# Altium PCB 板.PcbDoc (part 4 of 4)
Units mm, origin at the board's own origin, x right, y up, seen from the top; angles counter-clockwise.
Board outline 152.4 x 101.6 mm, 4 copper layers (Top Layer, VCC, GND, Bottom Layer); 183 components, 548 nets, 1331 pads, 689 vias.
Unrouted connection lines stored in the file: 6.
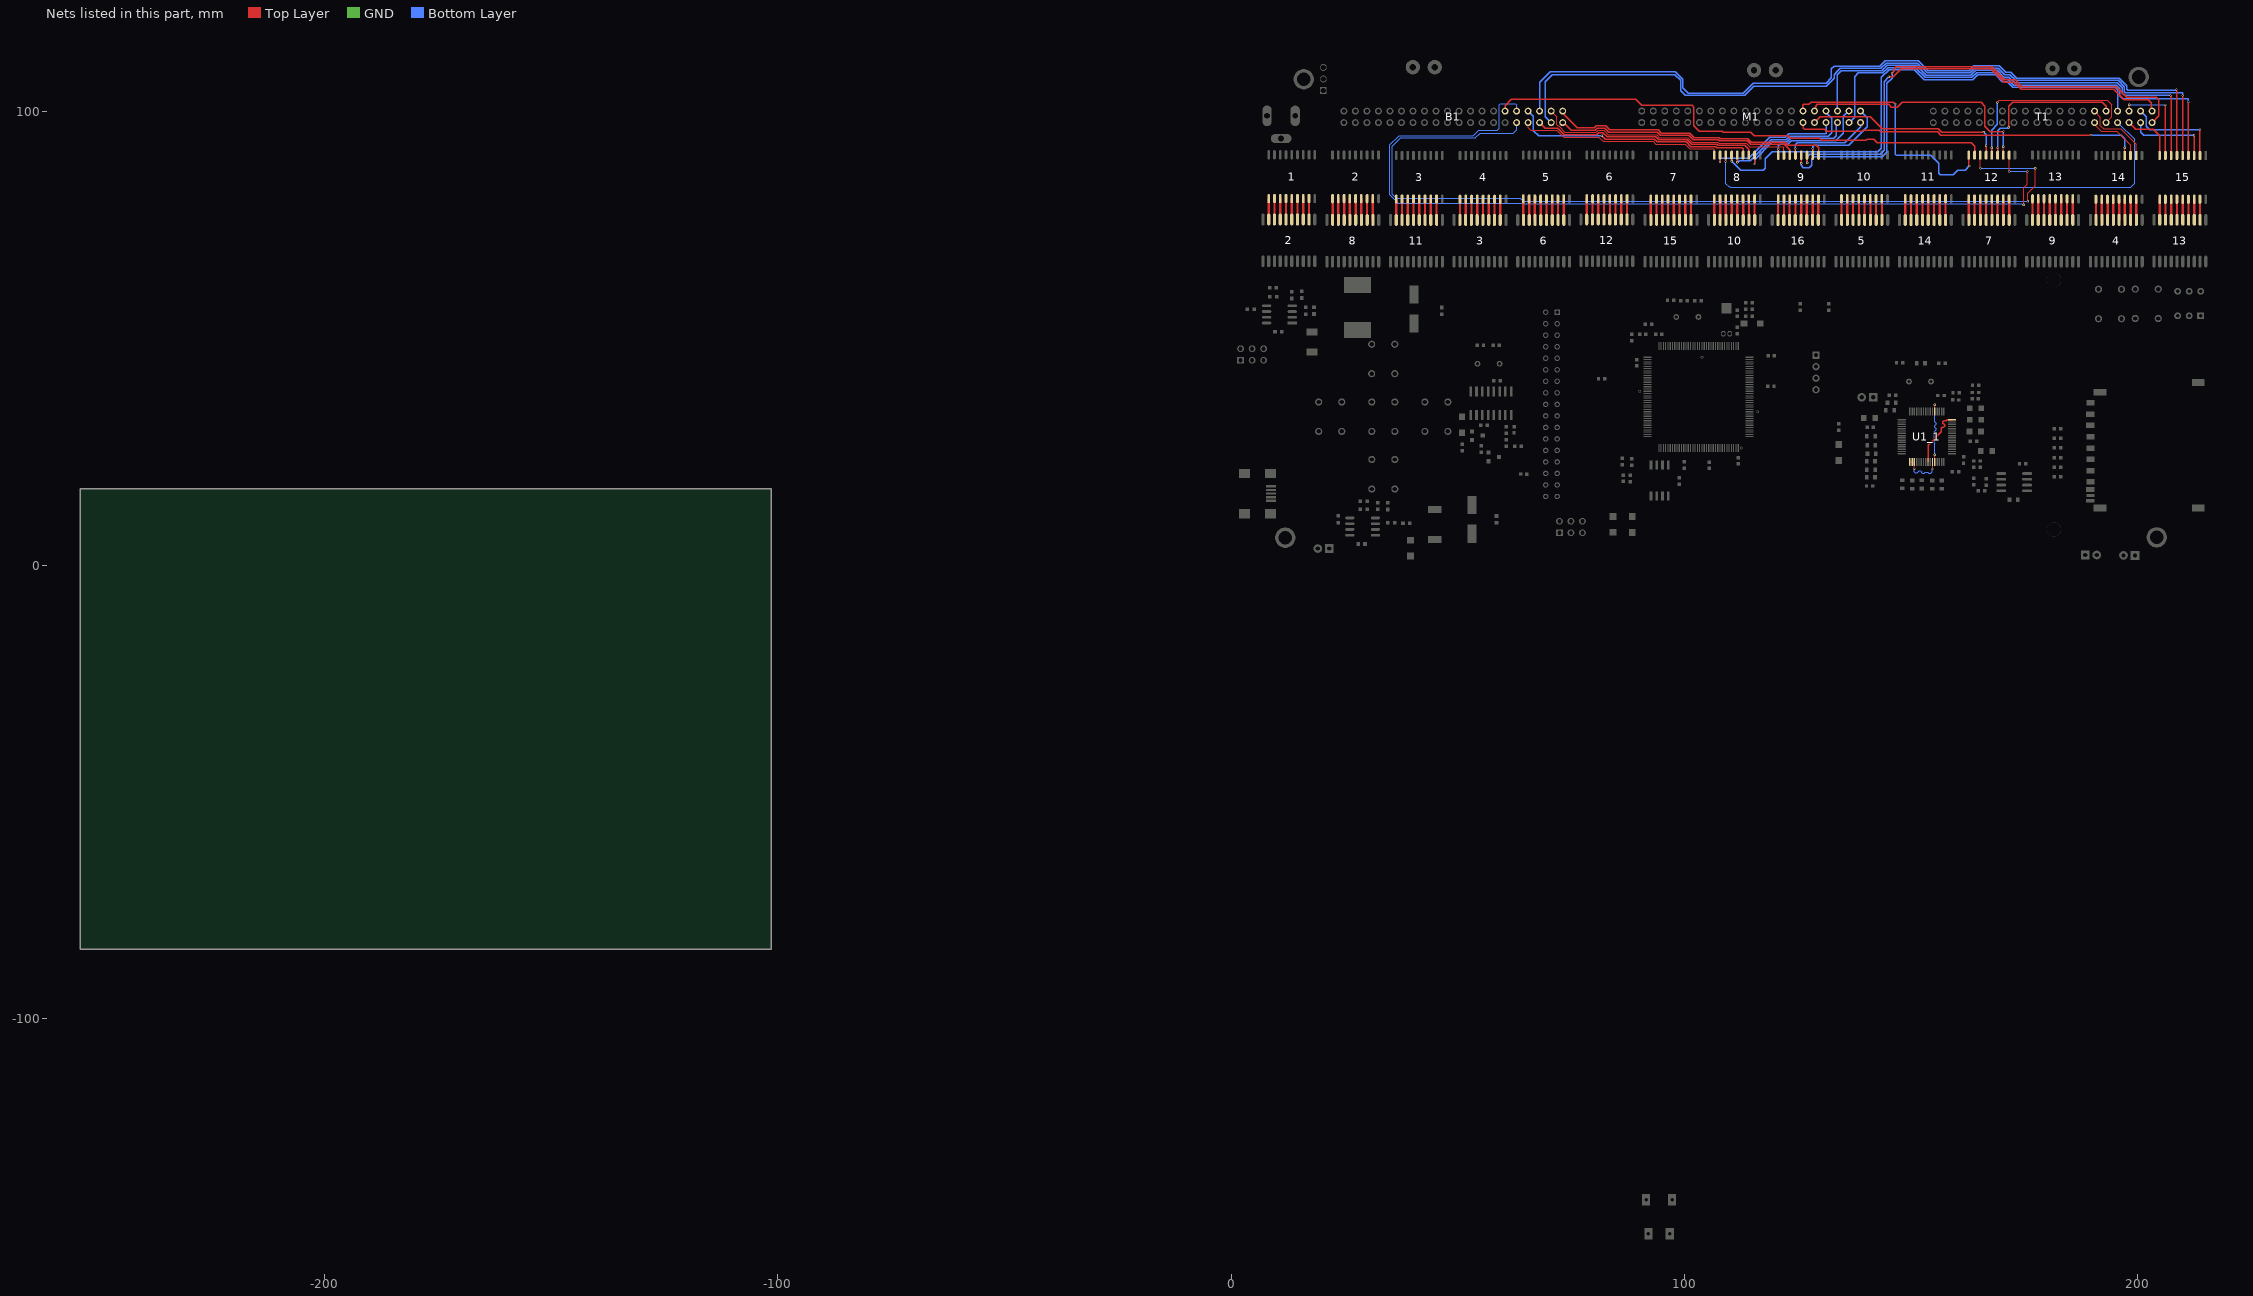
[diagram p6: the nets of this part, all layers, seen from the top]

## Via types
v1: diameter 0.5, hole 0.3, Top Layer to Bottom Layer, 646 vias
v2: diameter 1, hole 0.711, Top Layer to Bottom Layer, 35 vias
v3: diameter 0.5, hole 0.4, Top Layer to Bottom Layer, 2 vias
v4: diameter 1.27, hole 1.016, Top Layer to Bottom Layer, 2 vias
v5: diameter 1, hole 1, Top Layer to Bottom Layer, 2 vias
v6: diameter 3, hole 3, Top Layer to Bottom Layer, tented both sides, 2 vias

## Nets (pads, with @x,y where several pads share a name; then routed paths per layer and width w, separated by ;. In a path a pad name is that pad's centre, name@x,y a point inside that pad or via, vN(x,y) a via of type N, cw(c..) or ccw(c..) an arc to the next point about the centre after c; other vN are vias at no path point) (continued)
W86: 14.13@197.079,90.322 M1.15 | length 77
  Top Layer w0.254: 14.13@197.079,90.322 197.079,91.973 v1(197.104,91.999)
  Top Layer w0.3: M1.15@126.111,97.587 126.223,97.475 126.223,96.375 126.535,96.063 130.89,96.063 131.293,95.66 139.128,95.66 139.387,95.92 142.946,95.92 143.293,95.572 155.787,95.572 156.544,94.815 156.547,94.818 v1(189.636,94.818)
  Bottom Layer w0.3: v1(189.636,94.818) 196.291,94.818 197.104,94.005 v1(197.104,91.999)
W87: 14.12@198.349,90.322 T1.15 | length 12.5
  Top Layer w0.254: T1.15@190.416,97.561 190.416,97.087 191.889,95.613 195.318,95.613 198.349,92.583 14.12@198.349,90.322
W88: 14.11@199.619,90.322 T1.35 | length 15.8
  Top Layer w0.254: T1.35@190.416,100.101 191.719,98.798 191.719,96.901 192.43,96.19 196.24,96.19 199.619,92.812 14.11@199.619,90.322
W89: 12.18@162.687,90.399 M1.35 | length 55.9
  Top Layer w0.3: M1.35@126.111,100.127 126.111,101.399 126.287,101.575 127.388,101.575 127.921,102.108 146.075,102.108 v1(146.507,101.676) ; 12.18@162.687,90.399 162.725,90.361 162.725,88.045 v1(162.763,88.007)
  Bottom Layer w0.3: v1(146.507,101.676) 146.507,90.524 146.683,90.348 154.28,90.348 156.058,88.57 156.058,86.36 156.337,86.081 159.233,86.081 160.249,87.097 161.853,87.097 v1(162.763,88.007)
W90: 12.17@163.957,90.399 B1.35 | length 114.2
  Top Layer w0.3: B1.35@60.419,100.101 60.419,101.313 61.779,102.673 89.224,102.673 90.551,101.346 101.651,101.346 102.057,100.94 102.057,96.926 103.278,95.706 108.271,95.706 108.487,95.49 114.614,95.49 115.396,94.709 122.775,94.709 123.41,94.074 129.773,94.074 130.192,93.654 140.009,93.654 140.31,93.955 141.707,93.955 142.494,93.167 163.195,93.167 163.957,92.405 12.17@163.957,90.399
W91: 12.16@165.227,90.399 B1.16 | length 205.1
  Top Layer w0.254: 12.16@165.227,90.399 165.227,87.528 v1(165.278,87.478) ; v1(175.717,80.213) 175.717,81.984 177.343,83.61 v1(177.343,87.478)
  GND w0.254: B1.16@62.959,97.561 B1.16@63.144,97.376
  Bottom Layer w0.254: B1.16@62.959,97.561 62.959,95.953 62.23,95.225 54.889,95.225 53.848,94.183 37.44,94.183 35.56,92.304 35.56,81.77 36.424,80.906 63.747,80.906 64.44,80.213 157.023,80.213 v1(175.717,80.213) ; v1(165.278,87.478) v1(177.343,87.478)
W92: 12.15@166.497,90.399 M1.16 | length 44.5
  Top Layer w0.3: M1.16@128.651,97.587 129.921,98.857 140.97,98.857 143.561,96.266 155.956,96.266 156.743,95.479 v1(165.964,95.479) ; 12.15@166.497,90.399 v1(166.497,92.456)
  Bottom Layer w0.3: v1(165.964,95.479) 166.497,94.945 v1(166.497,92.456)
W93: 12.14@167.767,90.399 T1.16 | length 43.2
  Top Layer w0.254: v1(167.742,92.05) v1@167.754,92.037 ; 12.14@167.754,90.411 12.14@167.767,90.399 12.14@167.767,89.764 ; v1(168.961,102.032) 169.424,102.495 193.263,102.495 194.259,101.498 194.259,98.864 T1.16@192.956,97.561
  Top Layer w0.3: 12.14@167.754,90.411 v1@167.754,92.037
  Bottom Layer w0.3: v1(167.742,92.05) 167.742,95.936 168.961,97.155 v1(168.961,102.032)
W94: 12.13@169.037,90.399 T1.36 | length 37
  Top Layer w0.254: 12.13@169.037,89.738 12.13@169.037,90.399
  Top Layer w0.3: 12.13@169.037,90.399 v1(169.037,91.999) ; v1(171.475,96.545) 171.475,101.117 171.45,101.143 172.325,102.018 192.089,102.018 192.956,101.151 T1.36@192.956,100.101
  Bottom Layer w0.254: T1.36@192.956,100.101 T1.36@193.314,100.101
  Bottom Layer w0.3: v1(169.037,91.999) 169.037,95.783 169.635,96.382 171.312,96.382 v1(171.475,96.545)
W95: 12.12@170.307,90.399 M1.36 | length 54
  Top Layer w0.254: 12.12@170.307,90.399 v1(170.307,92.227)
  Top Layer w0.3: M1.36@128.651,100.127 128.885,100.361 128.885,101.23 129.255,101.6 145.009,101.6 145.618,100.99 146.939,100.99 147.966,102.018 165.394,102.018 166.243,101.168 166.243,96.774 167.411,95.606 v1(170.358,95.606)
  Bottom Layer w0.3: v1(170.307,92.227) 170.332,92.253 170.332,95.58 v1(170.358,95.606)
W96: 12.11@171.577,90.399 B1.36 | length 203.2
  Top Layer w0.254: v1(171.577,86.792) 12.11@171.577,90.399 ; v1(174.803,79.451) 174.803,80.228 174.803,83.189 175.565,83.951 v1(175.565,86.792)
  Bottom Layer w0.254: B1.36@62.959,100.101 62.959,101.473 62.654,101.778 59.436,101.778 59.157,101.498 59.157,96.368 58.699,95.91 54.585,95.91 53.365,94.691 37.033,94.691 35.027,92.685 35.027,81.661 36.855,79.832 64.062,79.832 64.217,79.676 156.8,79.676 174.374,79.676 174.6,79.451 v1(174.803,79.451) ; v1(171.577,86.792) v1(175.565,86.792)
W97: 8.18@106.553,90.399 B1.17 | length 45.4
  Top Layer w0.254: B1.17@65.499,97.561 65.549,97.511 65.549,96.418 66.065,95.902 71.797,95.902 73.317,94.382 81.118,94.382 82.075,93.425 93.074,93.425 93.675,92.823 100.129,92.823 101.132,91.821 106.35,91.821 106.553,91.618 8.18@106.553,90.399
W98: 8.17@107.823,90.399 M1.17 | length 30
  Top Layer w0.3: v1(107.823,88.875) 8.17@107.823,90.399
  Bottom Layer w0.3: v1(107.823,88.875) 107.823,89.533 107.999,89.709 114.144,89.709 118.753,94.318 122.178,94.318 122.957,95.098 131.191,95.098 M1.17@131.191,97.231
W99: 8.16@109.093,90.399 T1.17 | length 112.5
  Top Layer w0.254: v1(109.093,89.002) 8.16@109.093,90.399
  Bottom Layer w0.254: v1(109.093,89.002) 109.093,84.096 109.816,83.373 110.092,83.373 110.158,83.306 198.394,83.306 199.238,84.15 199.238,93.853 195.686,97.404 195.496,97.214 T1.17@195.496,97.561
W100: 8.15@110.363,90.399 T1.37 | length 114.5
  Top Layer w0.3: 8.15@110.363,90.399 110.376,90.386 110.376,89.065 v1(110.388,89.052)
  Bottom Layer w0.3: v1(110.388,89.052) 112.344,87.097 117.373,87.097 117.831,87.554 117.831,89.56 119.364,91.094 142.58,91.094 143.408,91.923 143.408,107.534 145.085,109.211 150.682,109.211 152.857,107.036 163.576,107.036 164.617,108.077 168.58,108.077 170.028,106.629 171.12,106.629 172.39,105.359 194.996,105.359 195.496,104.859 T1.37@195.496,100.101 T1.37@195.496,99.785
W101: 8.14@111.633,90.399 M1.37 | length 30.5
  Top Layer w0.254: M1.37@131.191,99.728 131.191,99.974 M1.37@131.191,100.127
  Top Layer w0.3: v1(111.633,88.849) 8.14@111.633,90.399 ; M1.37@131.107,100.058 M1.37@131.191,99.974
  Bottom Layer w0.3: v1(111.633,88.849) 111.687,88.849 112.047,89.209 114.485,89.209 119.094,93.818 122.385,93.818 123.164,94.598 131.398,94.598 131.416,94.615 131.699,94.615 132.41,95.326 132.41,98.501 131.191,99.72 M1.37@131.191,99.771
W102: 8.13@112.903,90.399 B1.37 | length 54.1
  Top Layer w0.3: v1(81.763,94.691) 82.552,93.902 93.321,93.902 93.923,93.3 100.327,93.3 101.329,92.298 106.838,92.298 107.061,92.075 112.598,92.075 112.903,91.77 8.13@112.903,90.399
  Bottom Layer w0.3: B1.37@65.499,100.101 66.675,98.925 66.675,95.809 67.793,94.691 v1(81.763,94.691)
W103: 8.12@114.173,90.399 B1.18 | length 50.3
  Top Layer w0.3: B1.18@68.039,97.561 69.221,96.379 71.994,96.379 73.514,94.859 80.584,94.859 81.102,95.377 81.991,95.377 82.966,94.402 93.646,94.402 94.248,93.8 100.534,93.8 101.536,92.798 107.067,92.798 107.29,92.575 113.299,92.575 114.173,91.702 8.12@114.173,90.399
W104: 8.11@115.443,90.399 M1.18 | length 25.8
  Top Layer w0.3: v1(115.443,88.443) 8.11@115.443,90.399
  Bottom Layer w0.3: v1(115.443,88.443) 115.443,89.383 119.379,93.318 122.592,93.318 123.372,94.098 131.605,94.098 131.615,94.107 132.932,94.107 133.497,94.671 133.497,96.997 M1.18@133.731,97.231
W105: 15.18@204.775,90.322 T1.18 | length 12.8
  Top Layer w0.254: T1.18@198.036,97.061 T1.18@198.036,97.561
  Top Layer w0.3: T1.18@198.036,97.561 199.484,96.114 203.378,96.114 204.775,94.717 15.18@204.775,90.322
W106: 15.17@206.045,90.322 T1.38 | length 20.9
  Top Layer w0.254: T1.38@198.036,99.739 T1.38@198.036,100.101 198.04,100.105 198.04,101.494 v1(198.044,101.498)
  Top Layer w0.3: 15.17@206.045,90.322 v1(206.045,101.473)
  Bottom Layer w0.254: v1(198.044,101.498) 198.057,101.486 206.032,101.486 v1(206.045,101.473)
W107: 15.16@207.315,90.322 M1.38 | length 99.3
  Top Layer w0.3: v1(207.162,103.556) 207.315,103.403 15.16@207.315,90.322
  Bottom Layer w0.3: M1.38@133.647,100.787 133.647,108.12 134.561,109.034 143.494,109.034 144.671,110.211 151.096,110.211 153.271,108.036 163.162,108.036 164.203,109.077 168.994,109.077 170.442,107.629 171.534,107.629 172.804,106.359 195.41,106.359 196.496,105.273 196.496,104.088 197.028,103.556 v1(207.162,103.556)
W108: 15.15@208.585,90.322 B1.38 | length 174.2
  Top Layer w0.254: 15.15@208.585,89.789 15.15@208.585,90.322
  Top Layer w0.3: v1(208.509,104.859) 208.509,90.449 208.483,90.424 15.15@208.585,90.322
  Bottom Layer w0.3: B1.38@68.039,100.101 68.039,106.418 70.383,108.763 97.989,108.763 99.611,107.141 99.611,105.215 100.762,104.064 112.954,104.064 115.138,106.248 131.22,106.248 132.385,107.413 132.385,109.449 132.97,110.034 143.08,110.034 144.256,111.211 151.511,111.211 153.686,109.036 162.748,109.036 163.789,110.077 169.408,110.077 170.856,108.629 171.948,108.629 173.218,107.359 195.824,107.359 197.496,105.687 197.496,104.942 197.782,104.656 208.305,104.656 v1(208.509,104.859)
W109: 15.14@209.855,90.322 B1.19 | length 176.2
  Top Layer w0.254: 15.14@209.855,89.687 15.14@209.855,90.322
  Top Layer w0.36: v1(209.829,103.556) 209.842,103.543 209.842,90.335 15.14@209.855,90.322
  Bottom Layer w0.3: B1.19@70.579,97.561 69.317,98.823 69.317,106.629 70.866,108.179 97.866,108.179 99.111,106.934 99.111,104.623 100.178,103.556 113.233,103.556 115.24,105.562 131.242,105.562 132.994,107.315 132.994,108.179 133.68,108.864 133.684,108.864 134.354,109.534 143.287,109.534 144.463,110.711 151.304,110.711 153.479,108.536 162.955,108.536 163.996,109.577 169.201,109.577 170.649,108.129 171.741,108.129 173.011,106.859 195.617,106.859 196.996,105.48 196.996,104.375 197.215,104.156 209.829,104.156 v1(209.829,103.556)
W110: 15.13@211.125,90.322 M1.19 | length 101.8
  Top Layer w0.3: 15.13@211.125,90.322 211.138,90.335 211.138,102.121 v1(211.15,102.133)
  Bottom Layer w0.3: M1.19@136.597,97.862 137.49,98.755 137.49,107.671 138.354,108.534 143.701,108.534 144.878,109.711 150.889,109.711 153.064,107.536 163.369,107.536 164.41,108.577 168.787,108.577 170.235,107.129 171.327,107.129 172.597,105.859 195.203,105.859 195.996,105.066 195.996,103.47 196.647,102.819 211.023,102.819 211.112,102.73 211.112,102.172 v1(211.15,102.133)
W111: 15.12@212.395,90.322 T1.19 | length 18.7
  Top Layer w0.3: v1(212.369,94.767) 212.382,94.755 212.382,90.335 15.12@212.395,90.322
  Bottom Layer w0.3: T1.19@200.576,97.561 200.576,95.436 201.244,94.767 v1(212.369,94.767)
W112: 15.11@213.665,90.322 T1.39 | length 21.7
  Top Layer w0.3: T1.39@200.558,100.119 T1.39@200.576,100.101 ; 15.11@213.665,90.322 v1(213.665,96.037)
  Bottom Layer w0.3: T1.39@200.576,100.101 201.803,98.874 201.803,96.799 202.565,96.037 v1(213.665,96.037)
W113: 9.18@120.65,90.373 M1.39 | length 22.9
  Top Layer w0.3: 9.18@120.65,90.373 120.709,90.432 v1(120.709,91.694)
  Bottom Layer w0.3: v1(120.709,91.694) 120.709,92.414 121.114,92.818 122.799,92.818 123.579,93.598 133.349,93.598 135.026,95.275 135.026,99.009 135.788,99.771 M1.39@136.271,99.771
W114: 9.17@121.92,90.373 B1.39 | length 57.8
  Top Layer w0.254: B1.39@70.579,100.101 71.857,98.823 71.857,97.053 72.054,96.856 72.192,96.856 73.623,95.425 80.476,95.425 80.905,95.854 82.2,95.854 83.175,94.879 93.844,94.879 94.445,94.277 100.731,94.277 101.734,93.275 107.264,93.275 107.487,93.052 113.577,93.052 114.351,92.278 121.768,92.278 121.92,92.126 9.17@121.92,90.373
W115: 9.16@123.19,90.373 B1.20 | length 54.1
  Top Layer w0.3: B1.20@73.119,97.561 73.354,97.561 75.013,95.902 80.278,95.902 80.707,96.331 82.398,96.331 83.257,95.472 93.936,95.472 94.653,94.754 100.929,94.754 101.931,93.752 107.462,93.752 107.685,93.529 113.775,93.529 114.548,92.755 121.965,92.755 123.19,91.53 9.16@123.19,90.373
W116: 9.15@124.46,90.373 M1.20 | length 19.1
  Top Layer w0.3: 9.15@124.46,90.373 v1(124.46,91.872) ; M1.20@138.64,97.83 M1.20@138.727,97.917
  Bottom Layer w0.3: v1(124.46,91.872) 124.46,92.742 124.816,93.098 135.287,93.098 138.811,96.622 M1.20@138.811,97.231
W117: 9.14@125.73,90.373 T1.20 | length 109.8
  Top Layer w0.3: v1(125.705,88.595) 125.717,88.608 125.717,90.36 9.14@125.73,90.373 ; v1(145.745,108.483) 145.745,108.491 146.237,108.982 146.237,109.457 146.69,109.91 167.747,109.91 170.66,106.997 172.877,106.997 174.406,105.469 195.217,105.469 197.536,103.149 204.064,103.149 204.622,102.591 204.622,99.068 T1.20@203.116,97.561
  Bottom Layer w0.3: v1(125.705,88.595) 125.743,88.557 125.743,88.125 126.213,87.655 127.533,87.655 128.041,88.163 128.041,89.535 128.6,90.094 143.586,90.094 144.551,91.059 144.551,106.197 145.745,107.391 v1(145.745,108.483)
W118: 9.13@127,90.373 T1.40 | length 100.9
  Top Layer w0.3: 9.13@127,90.373 127.013,90.361 127.013,88.709 v1(127.025,88.697) ; v1(145.059,107.671) 145.999,107.671 147.739,109.41 167.54,109.41 170.453,106.497 172.67,106.497 174.199,104.969 194.65,104.969 197.002,102.616 202.286,102.616 202.946,101.956 202.946,100.271 T1.40@203.116,100.101
  Bottom Layer w0.3: v1(127.025,88.697) 127.025,90.068 127.551,90.594 143.121,90.594 143.993,91.465 143.993,106.604 v1(145.059,107.671)
W119: 9.12@128.27,90.373 M1.40 | length 20.5
  Top Layer w0.2: 9.12@128.27,90.373 9.12@128.27,90.67 ; M1.40@138.811,99.711 M1.40@138.811,100.127
  Top Layer w0.3: 9.12@128.27,90.67 v1(128.27,91.872) ; M1.40@138.727,100.457 138.763,100.421 M1.40@139.177,100.421
  Bottom Layer w0.3: v1(128.27,91.872) 128.308,91.91 128.308,92.293 128.613,92.598 136.209,92.598 140.233,96.622 140.233,98.68 139.142,99.771 M1.40@138.811,99.771
W120: 9.11@129.54,90.373 B1.40 | length 62.3
  Top Layer w0.254: 9.11@129.54,90.373 9.11@129.553,90.361 ; 129.553,88.862 129.565,88.849
  Top Layer w0.3: B1.40@73.119,100.101 73.406,100.101 73.406,99.314 76.318,96.402 80.071,96.402 80.5,96.831 82.605,96.831 83.464,95.972 94.143,95.972 94.861,95.254 101.136,95.254 102.139,94.252 107.669,94.252 107.892,94.029 113.982,94.029 114.755,93.255 122.172,93.255 122.895,92.532 129.001,92.532 129.54,91.993 9.11@129.54,90.373
XIN: 
XOUT: 
XQ1: 1.1 2.19 | length 4.6
  Top Layer w0.5: 2.19@8.28,76.203 1.1@8.28,80.823
XQ2: 1.2 2.18@9.55,76.203 | length 4.6
  Top Layer w0.5: 2.18@9.55,76.203 1.2@9.55,80.823
XQ3: 1.3 2.17@10.82,76.203 | length 4.6
  Top Layer w0.5: 2.17@10.82,76.203 1.3@10.82,80.823
XQ4: 1.4 2.16@12.09,76.203 | length 4.6
  Top Layer w0.5: 2.16@12.09,76.203 1.4@12.09,80.823
XQ5: 1.5 2.15@13.36,76.203 | length 4.6
  Top Layer w0.5: 2.15@13.36,76.203 1.5@13.36,80.823
XQ6: 1.6 2.14@14.63,76.203 | length 4.6
  Top Layer w0.5: 2.14@14.63,76.203 1.6@14.63,80.823
XQ7: 1.7 2.13@15.9,76.203 | length 4.6
  Top Layer w0.5: 2.13@15.9,76.203 1.7@15.9,80.823
XQ8: 1.8 2.12@17.17,76.203 | length 4.6
  Top Layer w0.5: 2.12@17.17,76.203 1.8@17.17,80.823
XQ9: 5.19 10.1@134.595,80.772 | length 4.7
  Top Layer w0.5: 10.1@134.595,80.772 134.595,76.14 5.19@134.634,76.101
XQ10: 5.18@135.904,76.101 10.2@135.865,80.772 | length 4.6
  Top Layer w0.5: 5.18@135.904,76.101 10.2@135.904,80.733
XQ11: 5.17@137.174,76.101 10.3@137.135,80.772 | length 4.6
  Top Layer w0.5: 5.17@137.135,76.14 10.3@137.135,80.772
XQ12: 5.16@138.444,76.101 10.4@138.405,80.772 | length 4.6
  Top Layer w0.5: 5.16@138.444,76.101 10.4@138.444,80.733
XQ13: 5.15@139.714,76.101 10.5@139.675,80.772 | length 4.6
  Top Layer w0.5: 5.15@139.675,76.14 10.5@139.675,80.772
XQ14: 5.14@140.984,76.101 10.6@140.945,80.772 | length 4.6
  Top Layer w0.5: 5.14@140.984,76.101 10.6@140.984,80.733
XQ15: 5.13@142.254,76.101 10.7@142.215,80.772 | length 4.6
  Top Layer w0.5: 5.13@142.215,76.14 10.7@142.215,80.772
XQ16: 5.12@143.524,76.101 10.8@143.485,80.772 | length 4.6
  Top Layer w0.5: 5.12@143.524,76.101 10.8@143.524,80.733
XQ17: 2.1@22.352,80.797 8.19 | length 4.7
  Top Layer w0.5: 2.1@22.352,80.797 22.38,80.769 8.19@22.38,76.101
XQ18: 2.2@23.622,80.797 8.18@23.65,76.101 | length 4.7
  Top Layer w0.5: 2.2@23.622,80.797 23.622,76.129 8.18@23.65,76.101
XQ19: 2.3@24.892,80.797 8.17@24.92,76.101 | length 4.7
  Top Layer w0.5: 8.17@24.92,76.101 2.3@24.92,80.769
XQ20: 2.4@26.162,80.797 8.16@26.19,76.101 | length 4.7
  Top Layer w0.5: 2.4@26.162,80.797 26.162,76.129 8.16@26.19,76.101
XQ21: 2.5@27.432,80.797 8.15@27.46,76.101 | length 4.7
  Top Layer w0.5: 2.5@27.432,80.797 27.46,80.769 8.15@27.46,76.101
XQ22: 2.6@28.702,80.797 8.14@28.73,76.101 | length 4.7
  Top Layer w0.5: 2.6@28.702,80.797 28.702,76.129 8.14@28.73,76.101
XQ23: 2.7@29.972,80.797 8.13@30,76.101 | length 4.7
  Top Layer w0.5: 8.13@29.972,76.129 2.7@29.972,80.797
XQ24: 2.8@31.242,80.797 8.12@31.27,76.101 | length 4.7
  Top Layer w0.5: 8.12@31.242,76.129 2.8@31.242,80.797
XQ25: 3.1@36.398,80.696 11.19 | length 4.6
  Top Layer w0.5: 11.19@36.398,76.115 3.1@36.398,80.696
XQ26: 3.2@37.668,80.696 11.18@37.682,76.101 | length 4.6
  Top Layer w0.5: 11.18@37.682,76.101 3.2@37.682,80.682
XQ27: 3.3@38.938,80.696 11.17@38.952,76.101 | length 4.6
  Top Layer w0.5: 11.17@38.938,76.115 3.3@38.938,80.696
XQ28: 3.4@40.208,80.696 11.16@40.222,76.101 | length 4.6
  Top Layer w0.5: 11.16@40.222,76.101 3.4@40.222,80.682
XQ29: 3.5@41.478,80.696 11.15@41.492,76.101 | length 4.6
  Top Layer w0.5: 3.5@41.478,80.696 41.478,76.115 11.15@41.492,76.101
XQ30: 3.6@42.748,80.696 11.14@42.762,76.101 | length 4.6
  Top Layer w0.5: 11.14@42.762,76.101 3.6@42.762,80.682
XQ31: 3.7@44.018,80.696 11.13@44.032,76.101 | length 4.6
  Top Layer w0.5: 11.13@44.018,76.115 3.7@44.018,80.696
XQ32: 3.8@45.288,80.696 11.12@45.302,76.101 | length 4.6
  Top Layer w0.5: 11.12@45.302,76.101 3.8@45.302,80.682
XQ33: 11.1@148.666,80.772 14.19 | length 4.7
  Top Layer w0.5: 14.19@148.666,76.101 11.1@148.666,80.772
XQ34: 11.2@149.936,80.772 14.18@149.936,76.101 | length 4.7
  Top Layer w0.5: 14.18@149.936,76.101 11.2@149.936,80.772
XQ35: 11.3@151.206,80.772 14.17@151.206,76.101 | length 4.7
  Top Layer w0.5: 14.17@151.206,76.101 11.3@151.206,80.772
XQ36: 11.4@152.476,80.772 14.16@152.476,76.101 | length 4.7
  Top Layer w0.5: 14.16@152.476,76.101 11.4@152.476,80.772
XQ37: 11.5@153.746,80.772 14.15@153.746,76.101 | length 4.7
  Top Layer w0.5: 14.15@153.746,76.101 11.5@153.746,80.772
XQ38: 11.6@155.016,80.772 14.14@155.016,76.101 | length 4.7
  Top Layer w0.5: 14.14@155.016,76.101 11.6@155.016,80.772
XQ39: 11.7@156.286,80.772 14.13@156.286,76.101 | length 4.7
  Top Layer w0.5: 14.13@156.286,76.101 11.7@156.286,80.772
XQ40: 11.8@157.556,80.772 14.12@157.556,76.101 | length 4.7
  Top Layer w0.5: 14.12@157.556,76.101 11.8@157.556,80.772
XQ41: 3.19 4.1@50.47,80.67 | length 4.5
  Top Layer w0.5: 3.19@50.47,76.127 4.1@50.47,80.67
XQ42: 3.18@51.714,76.101 4.2@51.74,80.67 | length 4.5
  Top Layer w0.5: 3.18@51.714,76.101 4.2@51.714,80.644
XQ43: 3.17@52.984,76.101 4.3@53.01,80.67 | length 4.5
  Top Layer w0.5: 3.17@53.01,76.127 4.3@53.01,80.67
XQ44: 3.16@54.254,76.101 4.4@54.28,80.67 | length 4.5
  Top Layer w0.5: 3.16@54.254,76.101 4.4@54.254,80.644
XQ45: 3.15@55.524,76.101 4.5@55.55,80.67 | length 4.5
  Top Layer w0.5: 3.15@55.55,76.127 4.5@55.55,80.67
XQ46: 3.14@56.794,76.101 4.6@56.82,80.67 | length 4.5
  Top Layer w0.5: 3.14@56.794,76.101 4.6@56.794,80.644
XQ47: 3.13@58.064,76.101 4.7@58.09,80.67 | length 4.5
  Top Layer w0.5: 3.13@58.09,76.127 4.7@58.09,80.67
XQ48: 3.12@59.334,76.101 4.8@59.36,80.67 | length 4.5
  Top Layer w0.5: 3.12@59.36,76.127 4.8@59.36,80.67
XQ49: 5.1@64.44,80.747 6.19 | length 4.6
  Top Layer w0.5: 6.19@64.44,76.137 5.1@64.44,80.747
XQ50: 5.2@65.71,80.747 6.18@65.746,76.101 | length 4.6
  Top Layer w0.5: 6.18@65.746,76.101 5.2@65.746,80.711
XQ51: 5.3@66.98,80.747 6.17@67.016,76.101 | length 4.6
  Top Layer w0.5: 6.17@66.98,76.137 5.3@66.98,80.747
XQ52: 5.4@68.25,80.747 6.16@68.286,76.101 | length 4.6
  Top Layer w0.5: 6.16@68.286,76.101 5.4@68.286,80.711
XQ53: 5.5@69.52,80.747 6.15@69.556,76.101 | length 4.7
  Top Layer w0.5: 5.5@69.52,80.747 69.52,76.137 6.15@69.556,76.101
XQ54: 5.6@70.79,80.747 6.14@70.826,76.101 | length 4.6
  Top Layer w0.5: 6.14@70.826,76.101 5.6@70.826,80.711
XQ55: 5.7@72.06,80.747 6.13@72.096,76.101 | length 4.6
  Top Layer w0.5: 6.13@72.06,76.137 5.7@72.06,80.747
XQ56: 5.8@73.33,80.747 6.12@73.366,76.101 | length 4.6
  Top Layer w0.5: 6.12@73.366,76.101 5.8@73.366,80.711
XQ57: 9.19 13.1@176.729,80.768 | length 4.7
  Top Layer w0.5: 9.19@176.729,76.101 13.1@176.729,80.768
XQ58: 9.18@177.999,76.101 13.2@177.999,80.768 | length 4.7
  Top Layer w0.5: 9.18@178.003,76.105 13.2@178.003,80.772
XQ59: 9.17@179.269,76.101 13.3@179.269,80.768 | length 4.7
  Top Layer w0.5: 9.17@179.269,76.101 13.3@179.269,80.768
XQ60: 9.16@180.539,76.101 13.4@180.539,80.768 | length 4.7
  Top Layer w0.5: 9.16@180.543,76.105 13.4@180.543,80.772
XQ61: 9.15@181.809,76.101 13.5@181.809,80.768 | length 4.7
  Top Layer w0.5: 9.15@181.809,76.101 13.5@181.809,80.768
XQ62: 9.14@183.079,76.101 13.6@183.079,80.768 | length 4.7
  Top Layer w0.5: 9.14@183.083,76.105 13.6@183.083,80.772
XQ63: 9.13@184.349,76.101 13.7@184.349,80.768 | length 4.7
  Top Layer w0.5: 9.13@184.349,76.101 13.7@184.349,80.768
XQ64: 9.12@185.619,76.101 13.8@185.619,80.768 | length 4.7
  Top Layer w0.5: 9.12@185.623,76.105 13.8@185.623,80.772
XQ65: 6.1@78.435,80.772 12.19 | length 4.5
  Top Layer w0.5: 12.19@78.435,76.228 6.1@78.435,80.772
XQ66: 6.2@79.705,80.772 12.18@79.68,76.203 | length 4.5
  Top Layer w0.5: 12.18@79.68,76.203 6.2@79.68,80.747
XQ67: 6.3@80.975,80.772 12.17@80.95,76.203 | length 4.5
  Top Layer w0.5: 12.17@80.975,76.228 6.3@80.975,80.772
XQ68: 6.4@82.245,80.772 12.16@82.22,76.203 | length 4.5
  Top Layer w0.5: 12.16@82.22,76.203 6.4@82.22,80.747
XQ69: 6.5@83.515,80.772 12.15@83.49,76.203 | length 4.5
  Top Layer w0.5: 6.5@83.515,80.772 83.566,80.772 12.15@83.566,76.279
XQ70: 6.6@84.785,80.772 12.14@84.76,76.203 | length 4.5
  Top Layer w0.5: 12.14@84.76,76.203 6.6@84.76,80.747
XQ71: 6.7@86.055,80.772 12.13@86.03,76.203 | length 4.5
  Top Layer w0.5: 12.13@86.055,76.228 6.7@86.055,80.772
XQ72: 6.8@87.325,80.772 12.12@87.3,76.203 | length 4.5
  Top Layer w0.5: 12.12@87.3,76.203 6.8@87.3,80.747
XQ73: 7.1@92.532,80.696 15.19 | length 4.6
  Top Layer w0.5: 15.19@92.532,76.108 7.1@92.532,80.696
XQ74: 7.2@93.802,80.696 15.18@93.828,76.104 | length 4.6
  Top Layer w0.5: 15.18@93.809,76.101 7.2@93.809,80.689
XQ75: 7.3@95.072,80.696 15.17@95.098,76.104 | length 4.6
  Top Layer w0.5: 7.3@95.072,80.696 95.072,76.108 15.17@95.079,76.101
XQ76: 7.4@96.342,80.696 15.16@96.368,76.104 | length 4.6
  Top Layer w0.5: 15.16@96.349,76.101 7.4@96.349,80.689
XQ77: 7.5@97.612,80.696 15.15@97.638,76.104 | length 4.6
  Top Layer w0.5: 15.15@97.612,76.108 7.5@97.612,80.696
XQ78: 7.6@98.882,80.696 15.14@98.908,76.104 | length 4.6
  Top Layer w0.5: 15.14@98.889,76.101 7.6@98.889,80.689
XQ79: 7.7@100.152,80.696 15.13@100.178,76.104 | length 4.6
  Top Layer w0.5: 15.13@100.152,76.108 7.7@100.152,80.696
XQ80: 7.8@101.422,80.696 15.12@101.448,76.104 | length 4.6
  Top Layer w0.5: 15.12@101.429,76.101 7.8@101.429,80.689
XQ81: 4.19 14.1@190.729,80.67 | length 4.5
  Top Layer w0.5: 4.19@190.761,76.101 14.1@190.761,80.638
XQ82: 4.18@192.031,76.101 14.2@191.999,80.67 | length 4.5
  Top Layer w0.5: 4.18@191.999,76.133 14.2@191.999,80.67
XQ83: 4.17@193.301,76.101 14.3@193.269,80.67 | length 4.5
  Top Layer w0.5: 4.17@193.301,76.101 14.3@193.301,80.638
XQ84: 4.16@194.571,76.101 14.4@194.539,80.67 | length 4.5
  Top Layer w0.5: 4.16@194.539,76.133 14.4@194.539,80.67
XQ85: 4.15@195.841,76.101 14.5@195.809,80.67 | length 4.5
  Top Layer w0.5: 4.15@195.841,76.101 14.5@195.841,80.638
XQ86: 4.14@197.111,76.101 14.6@197.079,80.67 | length 4.5
  Top Layer w0.5: 4.14@197.079,76.133 14.6@197.079,80.67
XQ87: 4.13@198.381,76.101 14.7@198.349,80.67 | length 4.5
  Top Layer w0.5: 4.13@198.381,76.101 14.7@198.381,80.638
XQ88: 4.12@199.651,76.101 14.8@199.619,80.67 | length 4.5
  Top Layer w0.5: 4.12@199.619,76.133 14.8@199.619,80.67
XQ89: 7.19 12.1@162.687,80.747 | length 4.6
  Top Layer w0.5: 7.19@162.697,76.101 12.1@162.697,80.736
XQ90: 7.18@163.968,76.101 12.2@163.957,80.747 | length 4.6
  Top Layer w0.5: 7.18@163.957,76.112 12.2@163.957,80.747
XQ91: 7.17@165.237,76.101 12.3@165.227,80.747 | length 4.6
  Top Layer w0.5: 7.17@165.237,76.101 12.3@165.237,80.736
XQ92: 7.16@166.507,76.101 12.4@166.497,80.747 | length 4.6
  Top Layer w0.5: 7.16@166.497,76.111 12.4@166.497,80.747
XQ93: 7.15@167.777,76.101 12.5@167.767,80.747 | length 4.6
  Top Layer w0.5: 7.15@167.777,76.101 12.5@167.777,80.736
XQ94: 7.14@169.047,76.101 12.6@169.037,80.747 | length 4.6
  Top Layer w0.5: 7.14@169.037,76.111 12.6@169.037,80.747
XQ95: 7.13@170.317,76.101 12.7@170.307,80.747 | length 4.6
  Top Layer w0.5: 7.13@170.307,76.111 12.7@170.307,80.747
XQ96: 7.12@171.587,76.101 12.8@171.577,80.747 | length 4.6
  Top Layer w0.5: 7.12@171.587,76.101 12.8@171.587,80.736
XQ97: 8.1@106.553,80.747 10.19 | length 4.6
  Top Layer w0.5: 10.19@106.553,76.118 8.1@106.553,80.747
XQ98: 8.2@107.823,80.747 10.18@107.841,76.101 | length 4.6
  Top Layer w0.5: 10.18@107.841,76.101 8.2@107.841,80.729
XQ99: 8.3@109.093,80.747 10.17@109.111,76.101 | length 4.6
  Top Layer w0.5: 10.17@109.093,76.118 8.3@109.093,80.747
XQ100: 8.4@110.363,80.747 10.16@110.381,76.101 | length 4.6
  Top Layer w0.5: 10.16@110.381,76.101 8.4@110.381,80.729
XQ101: 8.5@111.633,80.747 10.15@111.651,76.101 | length 4.6
  Top Layer w0.5: 10.15@111.633,76.118 8.5@111.633,80.747
XQ102: 8.6@112.903,80.747 10.14@112.921,76.101 | length 4.6
  Top Layer w0.5: 10.14@112.921,76.101 8.6@112.921,80.729
XQ103: 8.7@114.173,80.747 10.13@114.191,76.101 | length 4.6
  Top Layer w0.5: 10.13@114.191,76.101 8.7@114.191,80.729
XQ104: 8.8@115.443,80.747 10.12@115.461,76.101 | length 4.6
  Top Layer w0.5: 10.12@115.443,76.118 8.8@115.443,80.747
XQ105: 13.19 15.1@204.775,80.67 | length 4.5
  Top Layer w0.5: 13.19@204.8,76.126 15.1@204.8,80.645
XQ106: 13.18@206.07,76.126 15.2@206.045,80.67 | length 4.5
  Top Layer w0.5: 13.18@206.045,76.152 15.2@206.045,80.67
XQ107: 13.17@207.34,76.126 15.3@207.315,80.67 | length 4.5
  Top Layer w0.5: 13.17@207.34,76.126 15.3@207.34,80.645
XQ108: 13.16@208.61,76.126 15.4@208.585,80.67 | length 4.5
  Top Layer w0.5: 13.16@208.585,76.152 15.4@208.585,80.67
XQ109: 13.15@209.88,76.126 15.5@209.855,80.67 | length 4.5
  Top Layer w0.5: 13.15@209.88,76.126 15.5@209.88,80.645
XQ110: 13.14@211.15,76.126 15.6@211.125,80.67 | length 4.5
  Top Layer w0.5: 13.14@211.125,76.152 15.6@211.125,80.67
XQ111: 13.13@212.42,76.126 15.7@212.395,80.67 | length 4.5
  Top Layer w0.5: 13.13@212.42,76.126 15.7@212.42,80.645
XQ112: 13.12@213.69,76.126 15.8@213.665,80.67 | length 4.5
  Top Layer w0.5: 13.12@213.665,76.152 15.8@213.665,80.67
XQ113: 9.1@120.65,80.721 16.19 | length 4.6
  Top Layer w0.5: 16.19@120.602,76.101 9.1@120.602,80.673
XQ114: 9.2@121.92,80.721 16.18 | length 4.6
  Top Layer w0.5: 16.18@121.92,76.149 9.2@121.92,80.721
XQ115: 9.3@123.19,80.721 16.17 | length 4.6
  Top Layer w0.5: 16.17@123.142,76.101 9.3@123.142,80.673
XQ116: 9.4@124.46,80.721 16.16 | length 4.6
  Top Layer w0.5: 16.16@124.46,76.149 9.4@124.46,80.721
XQ117: 9.5@125.73,80.721 16.15 | length 4.6
  Top Layer w0.5: 16.15@125.73,76.149 9.5@125.73,80.721
XQ118: 9.6@127,80.721 16.14 | length 4.6
  Top Layer w0.5: 16.14@126.952,76.101 9.6@126.952,80.673
XQ119: 9.7@128.27,80.721 16.13 | length 4.6
  Top Layer w0.5: 16.13@128.27,76.149 9.7@128.27,80.721
XQ120: 9.8@129.54,80.721 16.12 | length 4.6
  Top Layer w0.5: 16.12@129.492,76.101 9.8@129.492,80.673
XQVCC2: 
YS0: U1_1.16 U1_1.57 | length 12.9
  Top Layer w0.3: U1_1.57@153.691,22.746 153.691,26.463 156.591,29.362 156.591,30.15 156.796,30.355 157.101,30.355 157.394,30.648 157.394,30.896 156.982,31.308 156.982,31.557 157.234,31.809 157.713,31.809 157.949,32.046 U1_1.16@158.991,32.046
YS1: U1_1.21 U1_1.60 | length 14.7
  Top Layer w0.254: U1_1.60@155.191,22.746 v1(155.191,24.34) ; U1_1.21@155.191,33.846 v1(155.191,35.361)
  Bottom Layer w0.254: v1(155.191,24.34) 155.191,26.886 155.118,26.959 155.118,29.439 155.524,29.845 155.524,30.074 155.169,30.429 155.169,30.683 155.499,31.013 155.499,31.267 155.191,31.575 v1(155.191,35.361)
YS2: U1_1.49 U1_1.50 | length 0.5
  Top Layer w0.254: U1_1.49@149.691,22.746 U1_1.50@150.191,22.746
YS3: U1_1.51 U1_1.59 | length 9.4
  Top Layer w0.254: v1(150.691,21.193) U1_1.51@150.691,22.746 ; v1@154.691,21.113 v1(154.691,21.184) U1_1.59@154.691,22.746
  Bottom Layer w0.254: v1(150.691,21.193) 150.691,20.52 150.84,20.371 151.308,20.371 151.765,20.828 152.019,20.828 152.273,20.574 152.273,20.396 152.425,20.244 152.883,20.244 153.111,20.472 153.645,20.472 153.899,20.218 154.254,20.218 154.644,20.609 154.644,21.137 v1(154.691,21.184)
pads on no net: DC_IN.3 Designator141. Designator141.32 J1.10 J1.11 J1.12 J1_2.2 J1_2.3 J1_2.4 K1.1 K1.2 K1.3 K1.4 U1.106 U1_1.5 U1_1.6 U1_1.9 U1_1.19 U1_1.30 U1_1.31 U1_1.32 U1_1.33 U1_1.34 U1_1.35 U1_1.38 U1_1.58 U1_1.61 U1_1.63 U5.9 U5.10 U5.11 U5.12 U5.15 USB_2.4 USB_2.6 USB_2.7 USB_2.8 USB_2.9 USB_2.MH1 USB_2.MH2 Y1.
copper on no net:
  other v1: 51.638,74.092 36.982,74.168 56.896,74.168 41.123,74.193
  other v4: 92.024,-143.408 96.723,-143.408
  other v5: 92.024,-143.408 96.723,-143.408
  other v6: 202.235,22.428 202.336,33.122

## Polygon pours and split planes (outlines as drawn)
no net on GND "GND-No Net" (solid, pour order 10): 9.017,112.293
GND on GND "GND-GND" (solid, pour order 8): 21.971,111.633 22.174,111.43 22.174,95.301 22.428,95.047 215.925,95.047 215.951,95.021 215.951,5.039 215.91,5.08 215.468,5.08 215.392,5.004 214.935,5.004 214.808,4.877 214.427,4.877 214.249,4.699 213.97,4.699 213.716,4.445 213.512,4.445 213.208,4.14 213.055,4.14 212.75,3.835 212.725,3.835 212.42,3.531 212.369,3.531 212.369,3.429 212.115,3.175 212.115,3.099 211.887,2.87 211.887,2.718 211.582,2.413 211.582,2.184 211.455,2.057 211.455,1.778 211.277,1.6 211.277,1.295 211.15,1.168 211.15,0.817 211.07,0.737 211.099,0.707 211.099,0.406 211.049,0.356 211.049,0.058 210.99,0 210.889,0.102 5.131,0.102 5.08,0.152 5.08,0.686 5.029,0.737 5.029,1.194 4.801,1.422 4.801,1.803 4.623,1.981 4.623,2.21 4.394,2.438 4.394,2.616 4.166,2.845 4.166,2.972 3.962,3.175 3.962,3.226 3.937,3.226 3.683,3.48 3.683,3.505 3.378,3.81 3.302,3.81 2.972,4.14 2.845,4.14 2.565,4.42 2.362,4.42 2.108,4.674 1.905,4.674 1.702,4.877 1.27,4.877 1.168,4.978 0.711,4.978 0.635,5.055 0.055,5.055 0.051,5.051 0.051,103.581 0.152,103.683 0.711,103.683 0.762,103.734 1.575,103.734 1.753,103.911 2.388,103.911 2.667,104.191 3.15,104.191 3.48,104.521 3.785,104.521 4.191,104.927 4.42,104.927 4.953,105.461 5.182,105.461 5.69,105.969 5.69,106.02 6.223,106.553 6.223,106.731 6.731,107.239 6.731,107.417 7.188,107.874 7.188,108.229 7.544,108.585 7.544,109.068 7.798,109.322 7.798,109.779 7.95,109.931 7.95,110.388 8.077,110.515 8.077,111.125 8.128,111.176 8.128,111.531 8.23,111.633
no net on GND "GND-No Net 1" (solid, pour order 4): 13.081,113.716
VCC5 on VCC (solid, pour order 90): 67.056,21.539 67.031,21.565 39.929,21.565 39.929,28.905 49.962,38.938 50.089,38.811 53.061,38.811 53.061,35.662 67.107,21.615
NetD4_1 on VCC (solid, remove dead copper, pour order 88): 22.758,111.354 191.973,111.354 194.236,109.091 194.236,106.477 124.866,106.477 121.387,102.997 20.701,102.997 20.574,103.124 22.758,105.308
VCC5 on VCC "VCC-VCC5" (solid, pour order 84): 17.043,52.832 17.043,60.655 17.069,60.681 21.006,60.681 21.006,53.467 21.641,52.832
VCC5 on VCC "VCC5_L02_P066" (solid, pour order 66): 35.509,53.111 35.484,53.086 35.484,24.943 25.222,14.681 16.078,14.681 14.961,13.564 14.961,3.454 17.475,0.94 17.501,0.965 41.758,0.965 42.545,1.753 42.443,1.854 42.443,27.229 52.045,36.83 35.789,53.086 35.433,53.086
VCC5 on VCC "VCC5_L02_P064" (solid, pour order 64): 0.635,50.343 0.66,50.317 14.529,50.317 17.043,52.832 25.019,52.832 25.019,45.364 22.377,42.723 0.406,42.723 0.612,42.928 0.612,50.368
VCC5 on VCC "VCC5_L02_P062" (solid, pour order 62): 37.744,76.556 57.912,76.556 57.963,76.606 58.217,76.352 58.217,36.627 54.28,36.627 37.211,53.696 37.211,75.715 37.973,76.477
VCC3.3 on VCC "VCC3.3_L02_P060" (solid, pour order 60): 121.463,5.131 151.917,5.131 152.07,4.978 185.877,4.978 186.715,5.817 186.715,25.933 186.665,25.933 186.106,26.492 180.238,26.492 179.908,26.162 179.908,13.437 179.299,12.827 131.699,12.827 130.581,13.945 130.251,13.945 121.463,5.156
no net on VCC "VCC-No Net 3" (solid, pour order 56): 130.378,14.122
no net on VCC "VCC-No Net 4" (solid, pour order 54): 129.87,14.072
VCC3.3 on VCC "VCC3.3_L02_P052" (solid, pour order 52): 129.388,40.081 129.515,39.954 139.294,39.954 140.005,39.243 140.005,35.56 139.421,34.976 129.134,34.976 129.134,39.7 129.438,40.005
VCC3.3 on VCC "VCC3.3_L02_P046" (solid, pour order 46): 46.711,10.033 47.701,9.042 63.729,9.042 67.64,5.131 121.768,5.131 130.581,13.945 130.581,39.345 129.845,40.081 124.358,40.081 123.749,39.472 123.749,19.787 122.225,18.263 79.096,18.263 75.057,22.301 75.057,28.397 74.219,29.235 68.072,29.235 67.437,28.6 67.437,27.127 67.996,26.568 70.434,26.568 70.434,25.171 71.603,24.003 71.677,24.077 72.568,24.077 72.568,21.539 69.901,18.872 47.549,18.872 46.711,18.034
VCC3.3M on VCC "VCC3.3M_L02_P044" (solid, pour order 44): 81.077,62.205 81.255,62.382 120.371,62.382 120.371,62.306 122.174,60.503 122.072,60.401 122.072,21.666 119.736,19.329 80.899,19.329 77.521,22.708 77.521,59.004 77.622,59.004 81.001,62.382
no net on VCC "VCC-No Net 1" (solid, pour order 42): 57.556,53.467
VCC5 on VCC "VCC5_L02_P036" (solid, pour order 36): 31.318,59.436 35.484,55.27 35.484,52.883 66.904,21.463 70.409,21.463 70.891,21.946 70.891,23.063 69.875,24.079 68.504,24.079 65.634,26.949 65.634,30.886 56.083,40.437 52.095,40.437 37.998,54.534 37.998,61.062 32.944,61.062
VCC5 on VCC "VCC-VCC5 1" (solid, pour order 34): 31.369,76.708 31.318,76.657 31.318,59.436 31.598,59.157 36.906,59.157 37.973,60.223 37.973,76.477 37.691,76.759 31.344,76.759
no net on VCC "VCC-No Net 2" (solid, pour order 32): 209.456,62.382 210.134,61.705 210.134,59.65 210.399,59.385 212.242,59.385 212.42,59.563 212.42,61.402 210.944,62.878 210.55,62.484 209.448,62.484 209.245,62.281
VCC5 on VCC "VCC5_L02_P030" (solid, pour order 30): 7.036,79.096 7.01,79.121 6.198,78.308 6.172,78.308 6.172,76.327 6.553,75.946 203.987,75.946 204.495,76.454 204.495,78.257 203.657,79.096
DIN1-3 on VCC "DIN1-3_L02_P022" (solid, pour order 22): 187.63,79.477 203.987,79.477 205.943,77.521 205.943,65.608 209.956,61.595 209.956,59.827 210.576,59.207 211.861,59.207 212.446,59.792 212.446,61.112 211.353,62.205 211.353,75.209 202.26,84.303 0.914,84.303 0.33,83.718 0.33,53.645 1.143,52.832 3.937,52.832 5.613,54.508 5.613,78.461 6.858,79.705 187.376,79.705 187.63,79.451
NetD4_1 on VCC "NETD4_1_L02_P020" (solid, pour order 20): 11.252,85.979 11.278,85.979 11.862,85.395 11.887,85.42 202.235,85.42 212.649,75.006 212.649,59.36 213.436,58.572 215.951,58.572 215.951,91.872 214.884,92.939 21.285,92.939 19.431,94.793 19.431,101.321 23.317,105.207 23.317,110.795 22.758,111.354 18.821,111.354 18.237,110.769 18.263,110.744 18.263,106.756 13.538,106.756 11.252,104.47
no net on VCC "VCC-No Net" (solid, pour order 16): 18.136,109.804
VDD33 on VCC "VDD33_L02_P012" (solid, pour order 12): 140.538,35.001 140.564,35.027 140.564,43.434 173.533,43.434 179.172,37.795 179.172,13.462 178.968,13.665 164.44,13.665 164.44,19.152 169.672,24.384 169.672,34.9 169.647,34.925 140.589,34.925
GND on Top Layer (solid, remove dead copper, pour order 94): -0.076,71.958 216.027,71.958 216.07,71.915 216.07,0 0.508,0 0.406,-0.102 0.203,0.102 0.203,72.517 -0.152,72.161
no net on Top Layer (solid, pour order 92): 8,111.76
VCC3.3 on Top Layer "Top Layer-VCC3.3" (solid, pour order 80): 89.891,18.847 89.891,16.078 89.662,15.85 85.471,15.85 85.471,18.644 85.674,18.847
no net on Top Layer "Top Layer-No Net 3" (solid, pour order 78): 85.446,18.313
VCC3.3M on Top Layer "Top Layer-VCC3.3M" (solid, pour order 76): 85.496,22.617 85.584,22.53 89.916,22.53 89.916,19.355 89.84,19.279 85.547,19.279 85.547,22.53 85.496,22.581
no net on Top Layer "Top Layer-No Net 2" (solid, pour order 74): 90.5,21.565
no net on Top Layer "Top Layer-No Net" (solid, pour order 26): -1.143,61.112
no net on Top Layer "Top Layer-No Net 1" (solid, pour order 24): 1.219,59.182 1.27,59.233 2.21,59.233 2.21,55.448 2.946,54.712 2.87,54.635 1.397,54.635 1.092,54.94 1.194,55.042 1.194,59.131
GND on Bottom Layer (solid, remove dead copper, pour order 98): 8,111.76 8.025,111.785 215.9,111.785 215.9,0.17 216.019,0.051 0.254,0.051 0.229,0.025 0,0.254 0,111.76
no net on Bottom Layer (solid, pour order 96): 0,71.958
no net on Bottom Layer "Bottom Layer-No Net" (solid, pour order 68): 85.496,22.073

## Keep-outs
Keep-Out Layer:
  circle w0.254: c211.328,57.658 r1.545
  lines w0.2: 0,4.996 0,103.76 ; 4.996,0 210.99,0 ; 215.99,5 216.07,5 216.07,103.76
  lines w0.254: 0,5 cw(c0,0) 5,0 ; 0,103.76 ccw(c0,111.76) 8,111.76 102.692,111.76 ccw(c107.692,111.76) 112.692,111.76 208.07,111.76 ccw(c216.07,111.76) 216.07,103.76 ; 209.804,57.404 ccw(c211.455,57.785) 209.848,57.249 ; 211.07,0 cw(c216.07,0) 216.07,5

## Silkscreen, mask and mechanical layers (free items; w line width, h text height)
Top Overlay:
  lines w0.2: 131.064,18.415 131.064,33.63
  lines w0.254: 130.962,13.284 179.375,13.284 179.375,49.378 130.962,49.378 130.962,13.284
  text "6" at 21.692,99.619 h1.52
  text "5" at 87.655,99.314 h1.52
  text "4" at 151.816,99.238 h1.52
  text "3" at 151.917,96.774 h1.52
  text "2" at 87.706,96.698 h1.52
  text "1" at 22.225,96.52 h1.52
  text "DC-IN" at 1.186,93.218 h1.02
  text "GND" at 126.441,47.371 h0.64 r270
  text "voice" at 133.629,47.346 h1
  text "RXD" at 126.467,44.958 h0.64 r270
  text "TXD" at 126.467,42.443 h0.64 r270
  text "3V3" at 126.441,39.649 h0.64 r270
  text "K2" at 16.764,30.48 h2.02
  text "K1" at 40.386,30.48 h2.02
  text "BOOT0" at 62.738,27.178 h0.8
  text "BOOT1" at 70.866,18.796 h0.8
  text "B1" at 74.168,11.176 h2.02
  text "B0" at 74.422,4.572 h2.02
  text "SPKN" at 187.3,4.166 h0.51
  text "SPKL" at 190.195,4.14 h0.51
Bottom Overlay:
  lines w0.178: 162.687,0.381 174.244,0.381 174.498,0.381
  text "GND" at 4.488,100.076 h1.02
  text "IN" at 15.918,99.822 h2.02

## Text inside footprints (layer, text, board x,y; h text height)
Designator141: Bottom Overlay "D14" at 67.801,33.73 h0.71 r90; Bottom Overlay "RS" at 67.801,56.23 h0.71 r90; Bottom Overlay "CS" at 74.187,56.263 h0.71 r90; Bottom Overlay "WR" at 74.187,53.723 h0.71 r90; Bottom Overlay "RST" at 74.187,51.564 h0.71 r90; Bottom Overlay "D1" at 74.187,48.516 h0.71 r90; Bottom Overlay "D2" at 67.801,48.605 h0.71 r90; Bottom Overlay "D3" at 74.187,46.103 h0.71 r90; Bottom Overlay "D4" at 67.801,46.105 h0.71 r90; Bottom Overlay "D5" at 74.187,43.563 h0.71 r90; Bottom Overlay "D6" at 67.801,43.48 h0.71 r90; Bottom Overlay "D8" at 67.801,41.355 h0.71 r90; Bottom Overlay "D9" at 74.187,38.61 h0.71 r90; Bottom Overlay "D12" at 67.801,36.23 h0.71 r90; Bottom Overlay "D15" at 74.187,31.117 h0.71 r90; Bottom Overlay "VDD" at 74.187,26.164 h0.71 r90; Bottom Overlay "VDD" at 67.801,23.605 h0.71 r90; Bottom Overlay "GND" at 67.801,26.23 h0.71 r90; Bottom Overlay "VDD" at 67.801,28.73 h0.71 r90; Bottom Overlay "D10" at 67.801,38.855 h0.71 r90; Bottom Overlay "D0" at 67.801,51.105 h0.71 r90; Bottom Overlay "RD" at 67.801,53.73 h0.71 r90; Bottom Overlay "GND" at 67.801,31.23 h0.71 r90; Bottom Overlay "GND" at 74.187,23.751 h0.71 r90; Bottom Overlay "D11" at 74.187,36.197 h0.71 r90; Bottom Overlay "PEN" at 74.187,18.544 h0.71 r90; Bottom Overlay "CLK" at 67.801,16.105 h0.71 r90; Bottom Overlay "MOSI" at 67.801,21.355 h0.71 r90; Bottom Overlay "MO" at 67.801,18.105 h0.71 r90; Bottom Overlay "TCS" at 74.187,16.004 h0.71 r90; Bottom Overlay "MISO" at 74.187,21.465 h0.71 r90; Bottom Overlay "BL" at 74.187,28.196 h0.71 r90; Bottom Overlay "D14" at 67.807,33.728 h0.71 r90; Bottom Overlay "RS" at 67.807,56.228 h0.71 r90; Bottom Overlay "CS" at 74.193,56.261 h0.71 r90; Bottom Overlay "WR" at 74.193,53.721 h0.71 r90; Bottom Overlay "RST" at 74.193,51.562 h0.71 r90; Bottom Overlay "D1" at 74.193,48.514 h0.71 r90; Bottom Overlay "D2" at 67.807,48.603 h0.71 r90; Bottom Overlay "D3" at 74.193,46.101 h0.71 r90; Bottom Overlay "D4" at 67.807,46.103 h0.71 r90; Bottom Overlay "D5" at 74.193,43.561 h0.71 r90; Bottom Overlay "D6" at 67.807,43.478 h0.71 r90; Bottom Overlay "D8" at 67.807,41.353 h0.71 r90; Bottom Overlay "D9" at 74.193,38.608 h0.71 r90; Bottom Overlay "D13" at 74.203,33.728 h0.71 r90; Bottom Overlay "D12" at 67.807,36.228 h0.71 r90; Bottom Overlay "D15" at 74.193,31.115 h0.71 r90; Bottom Overlay "VDD" at 74.193,26.162 h0.71 r90; Bottom Overlay "VDD" at 67.807,23.603 h0.71 r90; Bottom Overlay "GND" at 67.807,26.228 h0.71 r90; Bottom Overlay "VDD" at 67.807,28.728 h0.71 r90; Bottom Overlay "D10" at 67.807,38.853 h0.71 r90; Bottom Overlay "D0" at 67.807,51.103 h0.71 r90; Bottom Overlay "RD" at 67.807,53.728 h0.71 r90; Bottom Overlay "GND" at 67.807,31.228 h0.71 r90; Bottom Overlay "GND" at 74.193,23.749 h0.71 r90; Bottom Overlay "D11" at 74.193,36.195 h0.71 r90; Bottom Overlay "PEN" at 74.193,18.542 h0.71 r90; Bottom Overlay "CLK" at 67.807,16.103 h0.71 r90; Bottom Overlay "MOSI" at 67.807,21.353 h0.71 r90; Bottom Overlay "MO" at 67.807,18.103 h0.71 r90; Bottom Overlay "TCS" at 74.193,16.002 h0.71 r90; Bottom Overlay "MISO" at 74.193,21.463 h0.71 r90; Bottom Overlay "BL" at 74.193,28.194 h0.71 r90; Bottom Overlay "D7" at 74.193,41.402 h0.71 r90
Designator178: Top Overlay "G" at 80.772,8.128 h1.27 r90; Top Overlay "3.3" at 70.104,6.858 h1.27 r90
Designator181: Top Overlay "GND" at 9.449,44.399 h1.27; Top Overlay "5V" at 9.195,46.939 h1.27